# EAGLE board 1WireStamp-V01-006 (EAGLE 9.3.0)
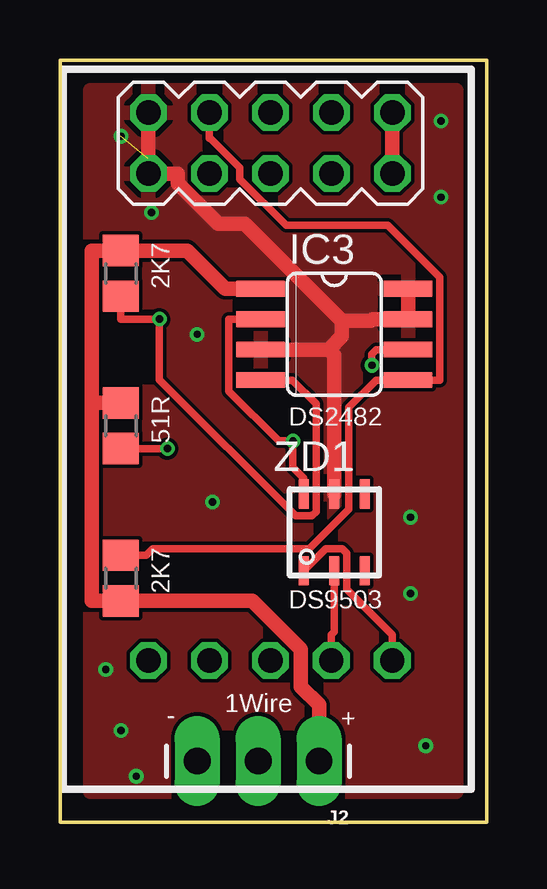
[diagram p0: board, top side]
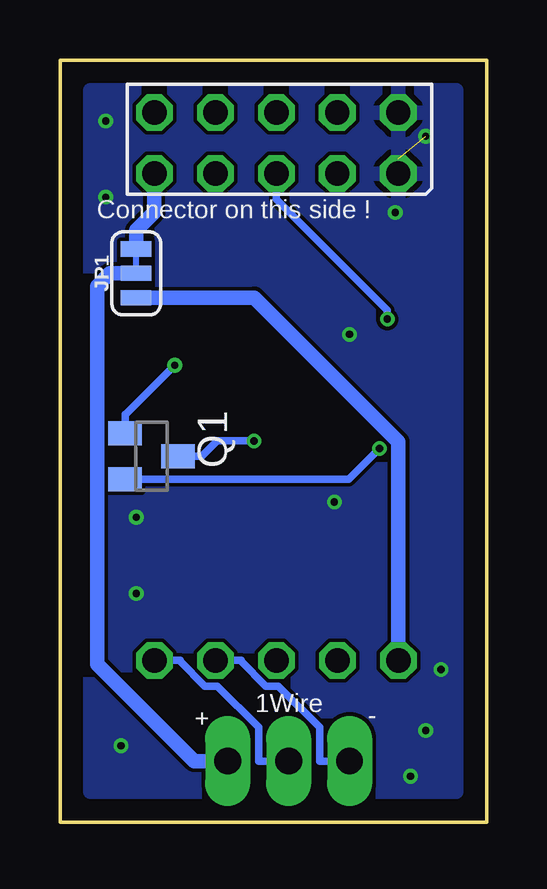
[diagram p1: board, bottom side, seen from below]

Size 17.78 x 31.75 mm. Coordinates in mm from the lower left corner, seen from the top.
Outline: 0,0 0,31.75 17.78,31.75 17.78,0 0,0
Copper layers (1*16): Top 0.035mm / dielectric 1.5mm / Bottom 0.035mm
Design rules "SeeedStudio_2layer_DRU_no_angle_20140221": minimum track width 6mil, minimum drill 12mil, track to track 6mil, track to pad 6mil, pad to pad 6mil, via to via 6mil, smd to smd 0mil, copper to edge 10mil, drill to drill 10mil, minimum pad ring 10mil, minimum via ring 6mil, stop-mask expansion 2mil, vias tented up to drill 100mil, thermal gap 10mil
Net classes: 0 default: width 0.305 mm; 1 Power: width 0.61 mm

## Footprints (pad centres in the part's own frame; a part is rotated, then mirrored left to right if it is on the bottom)
ONEWIRE_CC1101_MOD_WO_SILK = drill 1.016 octagon: 1W 24.638,13.716; 1W-GND 24.638,11.176; 4 24.638,6.096; 5 24.638,3.556; 5V 24.638,8.636; CSN 1.81,6.1; GDO0 4.35,6.1; GDO2 4.35,8.64; GND@0 1.81,3.56; GND@1 4.35,3.56; MISO 1.81,8.64; MOSI 1.81,11.18; SCK 4.35,11.18; VCC@0 1.81,13.72; VCC@1 4.35,13.72
SO08 = smd 0.66 x 2.032: 1 -1.905,-3.073; 2 -0.635,-3.073; 3 0.635,-3.073; 4 1.905,-3.073; 5 1.905,3.073; 6 0.635,3.073; 7 -0.635,3.073; 8 -1.905,3.073
1X03_LONGPADS = drill 1.118 pad 1.88 long: 1 0,0; 2 2.54,0; 3 5.08,0
SMT-JUMPER_3_1-NC_TRACE_SILK = smd 0.635 x 1.27: 1 -1.016,0; 2 0,0; 3 1.016,0
SOT23 = smd 1 x 1.4: 1 -0.95,-1.1; 2 0.95,-1.1; 3 0,1.1
R0805 = smd 1.3 x 1.5: 1 -0.95,0; 2 0.95,0
TSOC6 = smd 0.406 x 1.219: 1 -1.27,-1.6; 2 0,-1.6; 3 1.27,-1.6; 4 1.27,1.6; 5 0,1.6; 6 -1.27,1.6

## Placement (x,y rotation side)
CC2-EXT  ONEWIRE-MODULEONEWIRE_CC1101_WO-SILK  [ONEWIRE_CC1101_MOD_WO_SILK]  0.13,31.37 270 top
IC3  DS2482  [SO08]  11.43,20.32 270 top
J2  [1X03_LONGPADS]  10.79,2.54 180 top
JP1  JUMPER-SMT_3_1-NC_TRACE_SILK  [SMT-JUMPER_3_1-NC_TRACE_SILK]  14.61,22.86 90 bottom
Q1  BSS84  [SOT23]  13.97,15.24 270 bottom
R1  2k7  [R0805]  2.54,10.16 90 top
R2  2K7  [R0805]  2.54,22.86 270 top
R4  51  [R0805]  2.54,16.51 90 top
ZD1  DS9503P  [TSOC6]  11.43,12.06 0 top

## Library data of the parts
CC2-EXT = CC1101
IC3 ZD1 = 1wire
J2 = SparkFun-Connectors
JP1 = SparkFun-Jumpers
Q1 = transistor-small-signal
R1 R2 R4 = rcl; SPICEPREFIX: R

## Nets
1W: CC2-EXT.1W J2.2 ZD1.1
1W-GND: CC2-EXT.1W-GND J2.3 ZD1.2
CC_CS2: CC2-EXT.CSN IC3.5 R1.2
CC_IN_2: CC2-EXT.GDO2 IC3.4 R2.2
CC_OUT_2: CC2-EXT.GDO0
GND [Power]: CC2-EXT.GND@0 CC2-EXT.GND@1 IC3.3 IC3.7 IC3.8 ZD1.5
MISO1: CC2-EXT.MISO
MOSI1: CC2-EXT.MOSI
N$47: IC3.6 Q1.1
N$48: IC3.2 Q1.3 ZD1.6
N$52: Q1.2 R4.1
SCK1: CC2-EXT.SCK
V1W [Power]: IC3.1 J2.1 JP1.2 R1.1 R2.1 R4.2
VCC [Power]: CC2-EXT.VCC@0 CC2-EXT.VCC@1 JP1.3
VIN [Power]: CC2-EXT.5 JP1.1

## Tracks (layer width: path | path; a pad name or v marks a point on that pad's centre or on a via)
1W
  Top 0.305: CC2-EXT.1W 13.84,7.8 11.94,9.7 11.94,11.2 11.76,11.38 11.07,11.38 ZD1.1
  Bottom 0.305: J2.2 9.5,2.54 9.5,3.94 11.22,5.66 11.75,5.66 12.78,6.69 12.78,6.73 CC2-EXT.1W
1W-GND
  Top 0.305: CC2-EXT.1W-GND 11.3,7.8 11.43,7.92 ZD1.2
  Bottom 0.305: J2.3 6.96,2.54 6.96,3.95 8.68,5.66 9.21,5.66 10.24,6.69 10.24,6.73 CC2-EXT.1W-GND
CC_CS2
  Top 0.305: R1.2 3.6,11.11 3.86,11.38 10.39,11.38 12.04,13.03 12.04,17.27 13.18,18.41 IC3.5 15.82,18.41 15.82,22.69 13.66,24.86 9.42,24.86 7.5,26.78 7.5,27.26 6.27,28.49 6.23,28.49 CC2-EXT.CSN
CC_IN_2  (via drill 0.3 pad 0.61)
  Top 0.305: IC3.4 9.68,18.41 10.67,17.42 10.67,12.92 10.5,12.75 9.82,12.75 4.14,18.43 v4.14,20.95 2.54,20.95 R2.2
  Bottom 0.305: v4.14,20.95 4.14,21.33 8.77,25.95 CC2-EXT.GDO2
GND  (via drill 0.3 pad 0.61)  (1 unrouted)
  Top 0.61: 4.3,27.02 3.69,27.63 CC2-EXT.GND@0 | 4.3,27.02 4.91,27.02 4.91,26.61 6.6,24.92 7.7,24.92 11.74,20.88 | CC2-EXT.GND@1 4.3,27.02 | 11.19,19.68 11.74,20.23 11.74,20.88 | 11.74,20.88 12.96,20.88 13.03,20.95 IC3.7 IC3.8 | 11.19,19.68 11.43,19.45 11.43,14.73 ZD1.5 | 11.19,19.68 9.83,19.68 IC3.3
  other vias: 2.54,28.57 15.88,29.21 15.88,26.04 14.61,12.7 14.61,9.53 15.24,3.17 3.17,1.91 2.54,3.81 1.91,6.35 6.35,13.34 5.71,20.32 3.81,25.4
  pour Bottom: 1.27,30.48 1.27,1.27 16.51,1.27 16.51,30.48
  pour Top: 1.27,30.48 16.51,30.48 16.51,1.27 1.27,1.27
N$47  (via drill 0.3 pad 0.61)
  Top 0.305: v13,19.03 13,19.5 13.18,19.68 IC3.6
  Bottom 0.305: Q1.1 15.07,17 15.03,17 v13,19.03
N$48  (via drill 0.3 pad 0.61)
  Top 0.305: ZD1.6 10.16,14.32 9.7,14.78 v9.7,15.88 9.11,15.88 7.04,17.95 7.04,20.95 IC3.2
  Bottom 0.305: Q1.3 11.87,15.24 11.22,15.88 v9.7,15.88
N$52  (via drill 0.3 pad 0.61)
  Top 0.305: R4.1 v4.47,15.56
  Bottom 0.305: v4.47,15.56 5.74,14.29 14.06,14.29 Q1.2
V1W
  Top 0.61: 1.33,17.46 1.33,23.81 R2.1 3.75,23.81 5.3,23.81 6.88,22.23 IC3.1 | 1.33,17.46 1.52,17.46 R4.2 | 1.33,17.46 1.33,9.21 R1.1 8.01,9.21 10.03,7.19 10.03,5.64 10.79,4.88 J2.1
  Bottom 0.61: JP1.2 15.7,22.86 16.23,22.33 16.23,6.58 12.19,2.54 J2.1
VCC
  Top 0.61: CC2-EXT.VCC@1 CC2-EXT.VCC@0
  Bottom 0.61: JP1.3 14.61,24.65 13.85,25.41 CC2-EXT.VCC@1
VIN
  Bottom 0.61: JP1.1 9.68,21.84 3.68,15.85 CC2-EXT.5

## Text on the board
tNames: 2K7 | 51R | DS2482 | 2K7 | DS9503 | 1Wire | - | +
bNames: Connector on this side ! | 1Wire | - | +